# Altium PCB SSFocuser-C-TMC2208.PcbDoc
Units mm, origin at the board's own origin, x right, y up, seen from the top; angles counter-clockwise.
Board outline 77.93 x 40 mm, 2 copper layers (Top Layer, Bottom Layer); 49 components, 45 nets, 228 pads, 28 vias.
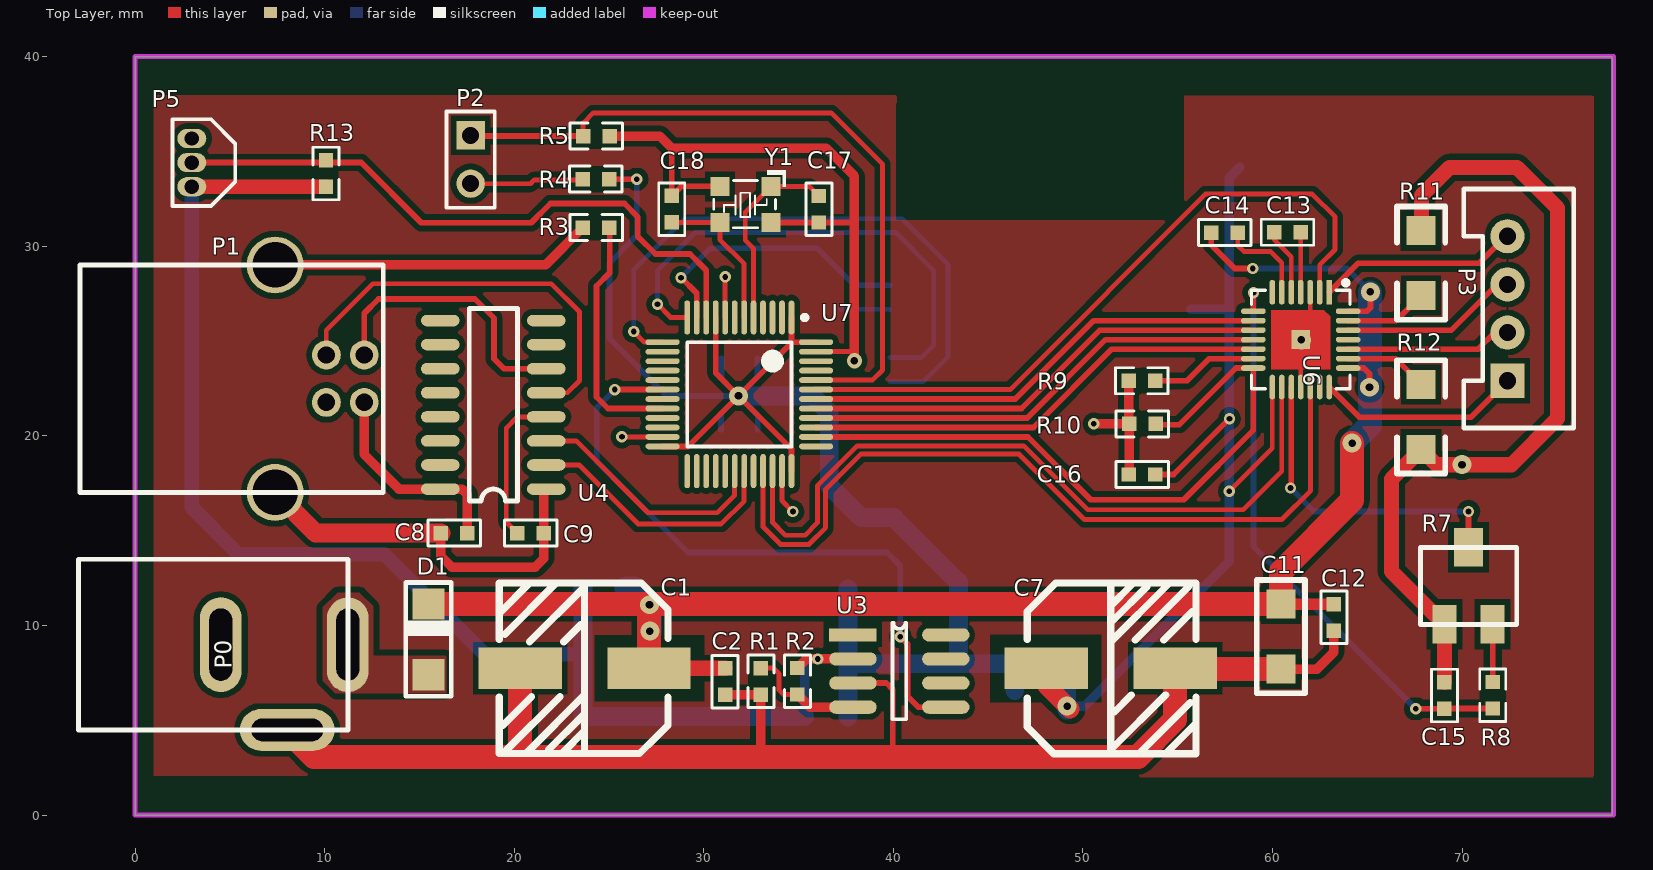
[diagram p0: Top Layer view]
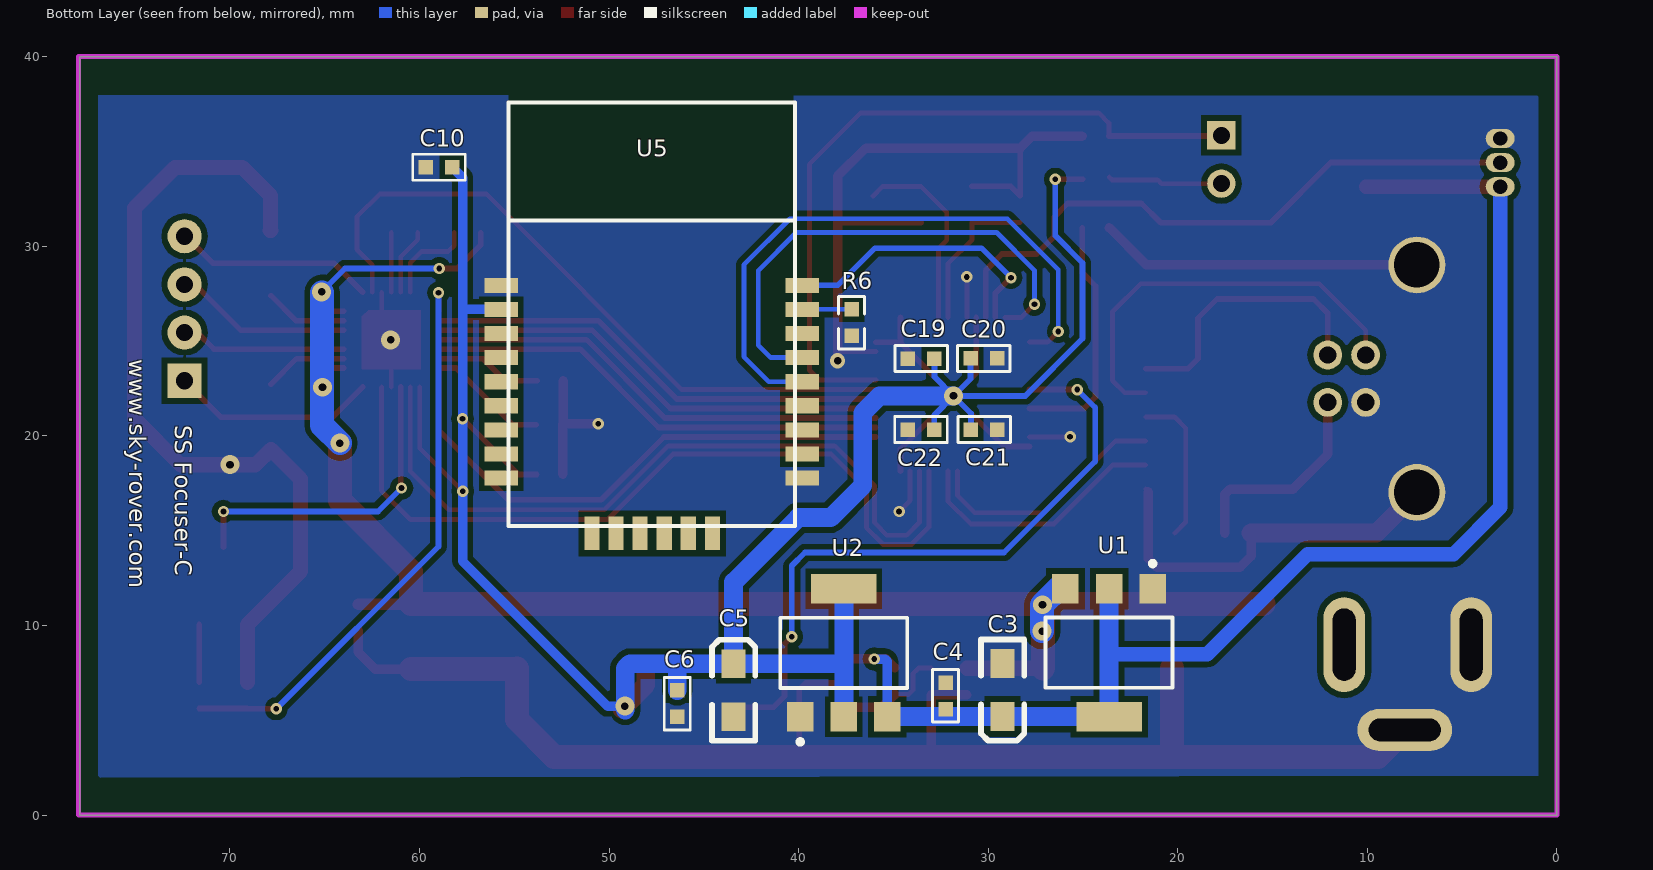
[diagram p1: Bottom Layer view, seen from below]

## Layer stack, top to bottom
Top Solder: solder mask 0.0102, Solder Resist, Dk 3.5
Top Layer: signal copper 0.0356
Dielectric1: dielectric 0.32, FR-4, Dk 4.8
Bottom Layer: signal copper 0.0356
Bottom Solder: solder mask 0.0102, Solder Resist, Dk 3.5

## Board outline
0,0 0,40.005 77.927,40.005 77.927,0

## Design rules (kind name [scope] priority, off if disabled: settings)
Clearance Clearance_pyog [InPolygon] p1: gap=0.305
Clearance Clearance_mcu [InComponentClass('U7')] p2: gap=0.178
Clearance [All] p3: gap=0.178
HoleSize [All] p1: absolutevalues=TRUE maxlimit=25.4 minlimit=0.025 maxpercent=80.000 minpercent=20.000
MinimumSolderMaskSliver [All] p1: minsoldermaskwidth=0
PolygonConnect [All] p1: connectstyle=Direct reliefconductorwidth=0.254 reliefentries=4 polygonreliefangle="90 Angle" airgapwidth=0.254
RoutingVias [All] p1: holewidth=0.711 width=1.27 viastyle="Through Hole" minholewidth=0.3 minwidth=0.45 maxholewidth=0.711 maxwidth=1.27
SilkToSilkClearance [All] p1: silktosilkclearance=0
SilkToSolderMaskClearance [IsPad] p1: minsilkscreentomaskgap=0 clearancetoexposedcopper=TRUE
SolderMaskExpansion [All] p1: expansion=0.102
Width [All] p1: maxlimit=1.27 minlimit=0.254 preferedwidth=0.254
25 further rules are at their usual default settings.

## Classes and differential pairs
component class SSFocuser-C: C1 C2 C3 C4 C5 C6 C7 C8 C9 C10 C11 C12 C13 C14 C15 C16 C22 D1 P0 P1 P2 P3 P5 R1 R2 R3 R4 R5 R6 R7 R8 R9 R10 R11 R12 R13 U1 U2 U3 U4 U5 U6 U7 Y1

## Components (designator, comment, footprint, x,y, rotation, side; value= is the part's Value field where it differs from the comment)
C1 "470uF" 16V/470U(CD10X10D5) 23.712,7.743 r180 top
C2 "100nF" 0603C 31.121,6.343 r90 top
C3 "10uF" 3216 29.24,5.192 r270 bottom
C4 "100nF" 0603C 32.248,6.985 r270 bottom
C5 "10uF" 3216 43.428,7.981 r90 bottom
C6 "100nF" 0603C 46.403,5.183 r90 bottom
C7 "1000uF" 16V/470U(CD10X10D5) 51.464,7.74 r0 top
C8 "100nF" 0603C 16.132,14.876 r0 top
C9 "100nF" 0603C 21.563,14.876 r180 top
C10 "100nF" 0603C 59.667,34.169 r180 bottom
C11 "1uF" 1206C 60.443,11.13 r270 top
C12 "100nF" 0603C 63.241,9.732 r90 top
C13 "22nF" 0603C 60.09,30.744 r0 top
C14 "100nF" 0603C 58.17,30.724 r180 top
C15 "2.2~4.7uF" 0603C 69.067,7.004 r270 top
C16 "100nF" 0603C 52.424,17.964 r0 top
C17 "20pF" 0603C 36.07,32.654 r270 top
C18 "20pF" 0603C 28.31,31.264 r90 top
C19 "100nF" 0603C 29.536,24.09 r0 bottom
C20 "100nF" 0603C 34.236,24.08 r180 bottom
C21 "100nF" 0603C 34.246,20.33 r180 bottom
C22 "100nF" 0603C 29.516,20.33 r0 bottom
D1 "M7" DO-214AC 15.477,9.27 r90 top
P0 "SOURCE" DC_5.5MM -2.973,13.492 r0 top locked
P1 "USB-B" USB-B 12.091,21.768 r0 top locked
P2 "BOOT0" HDR1X2 17.703,35.848 r270 top
P3 "Header 4" XH_4_V 72.39,22.911 r90 top locked
P5 "DS18B20" TO-92B 2.997,33.147 r90 top locked
R1 "2K" 0603R 33.015,7.752 r270 top
R2 "4.7K" 0603R 34.94,6.362 r90 top
R3 "10K" 0603R 23.621,30.984 r0 top
R4 "5K" 0603R 25.01,33.543 r180 top
R5 "10K" 0603R 23.637,35.817 r0 top
R6 "10K" 0603R 37.21,26.677 r270 bottom
R7 "RPot" VR_SMD 70.338,12.089 r0 top
R8 "20K" 0603R 71.615,5.622 r90 top
R9 "20K" 0603R 52.408,22.907 r0 top
R10 "20K" 0603R 52.438,20.637 r0 top
R11 "0.18Ω" 1206R 67.838,30.83 r270 top
R12 "0.18Ω" 1206R 67.838,19.292 r90 top
R13 "4.7K" 0603R 10.074,34.538 r270 top
U1 "AMS1117-5.0" SOT223 23.627,8.567 r0 bottom locked
U2 "AMS1117-3.3" SOT223 37.617,8.56 r180 bottom locked
U3 "MAX813LCSA" SOP-8 37.868,9.505 r0 top
U4 "CH340G" SO-16 21.692,17.196 r180 top locked
U5 "B-0006" B-0006 47.752,26.416 r180 bottom locked
U6 "TMC2208" "QFN28 5x5_M" 61.489,25.078 r180 top
U7 "STM32F103C8T6" LQFP48_N 31.878,22.196 r180 top
Y1 "8MHz" X3225 33.524,33.188 r180 top

## Footprints (in the part's own frame and the unit in brackets; to place one, negate y for a bottom-side part, rotate by r counter-clockwise, add the part's x,y. Pads: shape width x height; smd on the part's side, far side on the other; paste and mask are expansions set on the pad)
16V/470U(CD10X10D5) [mm] "取自《FE-3AD》"
  rect 4.4x2.2 smd: 1(-3.4,0) 2(3.4,0)
  Top Layer pour cut-out: -6.35,1.778 -0.508,1.778 -0.508,-1.778 -6.35,-1.778
  silkscreen extent -4.4,-4.5 4.5,4.5
0603C [mil]
  rect 30x30 smd: 1(0,0) 2(55,0)
  silkscreen extent -27,-27 82,27, body extent -4,-16 58,16, height 12
0603R [mil]
  rect 30x30 smd: 1(0,0) 2(55,0)
  silkscreen extent -27,-27 82,27, body extent -4,-18 58,16, height 18
1206C [mil]
  rect 60x60 smd: 1(0,0) 2(135,0)
  silkscreen extent -50,-50 185,50, body extent 6,-33 132,29, height 40
1206R [mil]
  rect 60x60 smd: 1(0,0) 2(135,0)
  silkscreen extent -50,-50 185,50, body extent 5,-32 131,30, height 22
3216 [mil]
  rect 60x50 smd: 1(0,0) 2(-110,0)
  silkscreen extent -160,-45 50,45, body extent -151,-35 38,36, height 73
B-0006 [mil]
  rect 70x31.5 smd: 1(-312.5,60) 2(-312.5,10) 3(-312.5,-40) 4(-312.5,-90) 5(-312.5,-140) 6(-312.5,-190) 7(-312.5,-240) 8(-312.5,-290) 9(-312.5,-340) 16(312.5,-340) 17(312.5,-290) 18(312.5,-240) 19(312.5,-190) 20(312.5,-140) 21(312.5,-90) 22(312.5,-40) 23(312.5,10) 24(312.5,60)
  rect 31.5x70 smd: 10(-124.04,-455) 11(-74.04,-455) 12(-24.04,-455) 13(25.96,-455) 14(75.96,-455) 15(125.96,-455)
  Top Layer pour cut-out: -298,439 -298,195 297,195 298,196 298,439
  silkscreen extent -298,-440 298,440
DC_5.5MM [mm]
  oval 2.2x5 hole 1.2 slot 3.8 at 90 deg: 1(14.2,-4.5) 2(7.5,-4.5)
  oval 5x2.2 hole 1.2 slot 3.8 at 0 deg: 3(11,-9)
  silkscreen extent 0,-9 14.2,0, body extent -0.1,-8.88 14.1,-0.12, height 10.82
DO-214AC [mm]
  rect 1.655x1.67 smd: 1(1.865,0) 2(-1.865,0)
  silkscreen extent -3,-1.2 3,1.2, body extent -2.74,-1.4 2.74,1.4, height 2.3
HDR1X2 [mm] "Connector; Header; 2 Position"
  rect 1.5x1.5 hole 0.9: 1(0,0)
  round 1.5 hole 0.9: 2(2.54,0)
  silkscreen extent -1.27,-1.27 3.81,1.27, body extent -1.27,-1.27 3.81,1.27, height 7.58
LQFP48_N [mm]
  oval 0.3x1.8 smd: 1(-2.75,-4.05) 2(-2.25,-4.05) 3(-1.75,-4.05) 4(-1.25,-4.05) 5(-0.75,-4.05) 6(-0.25,-4.05) 7(0.25,-4.05) 8(0.75,-4.05) 9(1.25,-4.05) 10(1.75,-4.05) 11(2.25,-4.05) 12(2.75,-4.05) 25(2.75,4.05) 26(2.25,4.05) 27(1.75,4.05) 28(1.25,4.05) 29(0.75,4.05) 30(0.25,4.05) 31(-0.25,4.05) 32(-0.75,4.05) 33(-1.25,4.05) 34(-1.75,4.05) 35(-2.25,4.05) 36(-2.75,4.05)
  oval 1.8x0.3 smd: 13(4.05,-2.75) 14(4.05,-2.25) 15(4.05,-1.75) 16(4.05,-1.25) 17(4.05,-0.75) 18(4.05,-0.25) 19(4.05,0.25) 20(4.05,0.75) 21(4.05,1.25) 22(4.05,1.75) 23(4.05,2.25) 24(4.05,2.75) 37(-4.05,2.75) 38(-4.05,2.25) 39(-4.05,1.75) 40(-4.05,1.25) 41(-4.05,0.75) 42(-4.05,0.25) 43(-4.05,-0.25) 44(-4.05,-0.75) 45(-4.05,-1.25) 46(-4.05,-1.75) 47(-4.05,-2.25) 48(-4.05,-2.75)
  silkscreen extent -3.58,-4.17 2.75,2.75, body extent -4.5,-4.5 4.5,4.5, height 1.5
"QFN28 5x5_M" [mm] "28脚，长x宽x高：5x5x0.8mm，脚距：0.5mm"
  rect 0.3x1.3 smd: 1(-1.5,-2.5)
  oval 0.3x1.3 smd: 2(-1,-2.5) 3(-0.5,-2.5) 4(0,-2.5) 5(0.5,-2.5) 6(1,-2.5) 7(1.5,-2.5) 15(1.5,2.5) 16(1,2.5) 17(0.5,2.5) 18(0,2.5) 19(-0.5,2.5) 20(-1,2.5) 21(-1.5,2.5)
  oval 1.3x0.3 smd: 8(2.5,-1.5) 9(2.5,-1) 10(2.5,-0.5) 11(2.5,0) 12(2.5,0.5) 13(2.5,1) 14(2.5,1.5) 22(-2.5,1.5) 23(-2.5,1) 24(-2.5,0.5) 25(-2.5,0) 26(-2.5,-0.5) 27(-2.5,-1) 28(-2.5,-1.5)
  rect 1x1 smd: 29(0,0)
  Top Layer region: -1.55,1.55 1.55,1.55 1.55,-1.55 -1.225,-1.55 -1.55,-1.225
  silkscreen extent -2.6,-3.12 2.6,2.6, body extent -2.51,-2.51 2.51,2.51, height 0.75
SO-16 [mil]
  oval 80x24 smd: 1(0,0) 2(0,-50) 3(0,-100) 4(0,-150) 5(0,-200) 6(0,-250) 7(0,-300) 8(0,-350) 9(220,-350) 10(220,-300) 11(220,-250) 12(220,-200) 13(220,-150) 14(220,-100) 15(220,-50) 16(220,0)
  silkscreen extent 60,-375 160,25, body extent -12,-377 226,29, height 77
SOP-8 [mm]
  rect 2.5x0.7 smd: 1(0,0)
  oval 2.5x0.7 smd: 2(0,-1.27) 3(0,-2.54) 4(0,-3.81) 5(4.9,-3.81) 6(4.9,-2.54) 7(4.9,-1.27) 8(4.9,0)
  silkscreen extent 2.08,-4.44 2.82,0.64, body extent -0.56,-4.44 5.48,0.58, height 1.6
SOT223 [mm] "SOT-223/SC-73; 4 Leads; Body 6.7 x 7.3 mm, inc. leads (LxW max)"
  rect 1.4x1.55 smd: 1(-2.3,-3.375) 2(0,-3.375) 3(2.3,-3.375)
  rect 3.45x1.55 smd: 4(0,3.375)
  silkscreen extent -3.35,-4.82 3.35,1.85, body extent -3.25,-3.53 3.25,3.43, height 1.7
TO-92B [mil]
  oval 40x60 hole 30: 1(0,0) 2(50,0) 3(100,0)
  silkscreen extent -40,-90 140,40
USB-B [mm]
  round 1.524 hole 0.92: 1(0,0) 2(0,2.5) 3(-2,2.5) 4(-2,0)
  round 3 hole 2.4: 5(-4.7,7.25) 6(-4.7,-4.75)
  silkscreen extent -15,-4.75 1,7.25
VR_SMD [mil]
  rect 50x80 smd: 1(-50,-80) 2(50,-80)
  rect 60x80 smd: 3(0,80)
  silkscreen extent -100,-80 100,80
X3225 [mm]
  rect 1x1 smd: 1(-0.025,0.025) 2(2.667,0.025) 3(2.667,1.93) 4(-0.025,1.93)
  silkscreen extent -0.81,-0.84 3,2.21, body extent -0.23,-0.29 2.97,2.21, height 0.72
XH_4_V [mm]
  rect 1.8x1.8 hole 0.9: 1(0,0)
  round 1.8 hole 0.9: 2(2.54,0) 3(5.08,0) 4(7.62,0)
  silkscreen extent -2.5,-3.5 10.12,2.3, body extent -2.39,-3.35 10.01,2.75, height 7

## Part data
C1: library part C470UF016S, "470UF      16V      CD10X10D5"
C2 C4 C6 C8 C10 C11 C12 C13 C14 C15 C16 C17 C18 C19 C20 C21 C22: library part Cap, "Capacitor"
C3 C5 C7: library part CAP2
C9: library part C
D1: library part Diode, "High Conductance Fast Diode"
P2: library part MHDR1X2, "Header, 2-Pin"
P3: "Header, 4-Pin"
P5: library part "Header 3", "Header, 3-Pin"
R1 R2 R5 R8 R9 R10 R11 R12 R13: library part RES, "Resistor"
R3 R4 R6: library part R
R7: "Potentiometer"
U1 U2: library part AMS1117
U3: library part MAX813L
U4: "USB2UART"
U7: "STM32 ARM-based 32-bit MCU Performance Line with 64 kB Flash, 20 kB Internal RAM, -40 to +85癈 Temperature, 48-Pin LQFP, Tray"
Y1: library part XTAL_1, "Crystal Oscillator"

## Via types
v1: diameter 0.6, hole 0.3, Top Layer to Bottom Layer, 18 vias
v2: diameter 1, hole 0.4, Top Layer to Bottom Layer, 9 vias
v3: diameter 0.8, hole 0.4, Top Layer to Bottom Layer, 1 vias

## Nets (pads, with @x,y where several pads share a name; then routed paths per layer and width w, separated by ;. In a path a pad name is that pad's centre, name@x,y a point inside that pad or via, vN(x,y) a via of type N, cw(c..) or ccw(c..) an arc to the next point about the centre after c; other vN are vias at no path point)
A1: P3.2 U6.24 | length 8.8
  Top Layer w0.3: U6.24 70.846,24.578 71.718,25.451 P3.2
A2: P3.1 U6.21 | length 10.9
  Top Layer w0.3: U6.21 64.582,20.985 70.464,20.985 P3.1
B1: P3.3 U6.26 | length 9.4
  Top Layer w0.3: U6.26 69.432,25.578 71.845,27.991 P3.3
B2: P3.4 U6.1 | length 10.6
  Top Layer w0.3: U6.1 64.516,29.105 70.898,29.105 72.324,30.531 P3.4
BOOT0: P2.1 R5.1 U7.44 | length 38.3
  Top Layer w0.254: R5.1 23.637,36.501 24.171,37.035 36.723,37.035 39.429,34.329 39.429,23.476 38.899,22.946 U7.44
  Top Layer w0.3: P2.1@17.703,35.817 R5.1
BOOT1: R3.2 U7.20 | length 13
  Top Layer w0.305: R3.2@25.041,30.984 25.041,28.61 24.336,27.904 24.336,22.053 24.944,21.446 U7.20
BRST: U5.24 U7.11 | length 14.9
  Top Layer w0.3: v1(28.801,28.35) 29.628,27.524 U7.11
  Bottom Layer w0.3: v1(28.801,28.35) 30.358,29.907 35.977,29.907 37.943,27.94 U5.24
BRX: U5.21 U7.12 | length 26.4
  Top Layer w0.254: v1(27.562,26.937) 28.253,26.246 U7.12
  Bottom Layer w0.254: v1(27.562,26.937) 27.562,28.73 29.56,30.729 40.121,30.729 42.132,28.718 42.132,24.791 41.471,24.13 U5.21
BTX: U5.20 U7.13 | length 32.2
  Top Layer w0.254: v1(26.306,25.507) 26.867,24.946 U7.13
  Bottom Layer w0.254: v1(26.306,25.507) 26.306,28.771 28.99,31.456 40.455,31.456 42.885,29.025 42.885,24.177 41.568,22.86 U5.20
D3V3: C5.1 C6.2 C7.1 C10.2 C16.2 C19.2 C20.2 C21.2 C22.2 R4.1 U2.2 U2.4 U5.2 U6.15 U7.1 U7.9 U7.24 U7.36 U7.48 | length 142.2
  Top Layer w0.254: v1(57.716,17.087) 59.989,19.36 U6.15
  Top Layer w0.3: R4.1 26.46,33.543 v1(26.464,33.539) ; U7.24 29.168,19.446 v2(31.832,22.11) ; U7.9 30.628,23.314 v2(31.832,22.11) ; U7.36 34.628,19.314 v2(31.832,22.11) ; U7.1 34.628,24.986 34.668,24.946 ; U7.48 34.668,24.946 ; C16.2 54.784,17.964 v1(57.73,20.911) ; v2(31.832,22.11) 34.668,24.946
  Top Layer w1: C7.1 48.064,6.85 v2@49.323,5.591
  Bottom Layer w0.3: v1(26.464,33.539) 26.464,30.564 25.023,29.122 25.023,25.136 28.049,22.11 v2(31.832,22.11) ; C22.2 30.913,21.191 v2(31.832,22.11) ; C19.2 30.933,23.009 v2(31.832,22.11) ; C20.2 32.839,23.116 v2(31.832,22.11) ; C21.2 32.849,21.094 v2(31.832,22.11)
  Bottom Layer w0.5: v2(49.171,5.743) 50.08,5.743 57.723,13.386 57.723,26.407 ; U5.2 57.699,26.67
  Bottom Layer w0.508: 57.723,26.407 57.723,33.623 C10.2
  Bottom Layer w1: v2(31.832,22.11) 35.728,22.11 36.619,21.219 36.619,17.382 38.312,15.689 40.027,15.689 43.428,12.287 C5.1 ; U2.2 U2.4 ; 37.672,7.981 C5.1 ; C6.2 46.403,7.838 46.259,7.981 ; v2@49.147,5.544 49.147,7.737 48.903,7.981 46.259,7.981 ; C5.1 46.259,7.981
D5V0: C3.1 C4.2 P5.1 R2.2 R13.2 U1.2 U1.4 U2.3 U3.2 | length 73.1
  Top Layer w0.5: R2.2 35.416,8.235 U3.2
  Top Layer w0.762: P5.1 10.068,33.147 R13.2
  Bottom Layer w0.5: U2.3 35.317,8.111 35.438,8.231 v1(36.007,8.231)
  Bottom Layer w0.762: P5.1 2.997,16.229 5.459,13.767 13.158,13.767 18.44,8.485 23.627,8.485
  Bottom Layer w1: U1.2 23.627,8.485 U1.4 U2.3@35.311,5.192
D12V0: C1.1 C2.2 C11.1 C12.2 C14.2 D1.1 U1.3 U6.22 U6.28 | length 90.6
  Top Layer w0.3: C14.2 56.773,30.059 58.005,28.827 v1(58.954,28.827) ; U6.22 64.811,23.578 65.114,23.275 v2(65.114,22.567) ; U6.28 64.987,26.578 65.165,26.756 v2(65.165,27.595)
  Top Layer w0.6: C11.1@60.445,11.129 C12.2
  Top Layer w0.8: C1.1@27.115,7.74 C2.2
  Top Layer w1.27: D1.1 C11.1@60.443,11.135 ; v2@27.096,11.135 27.112,11.119 C1.1 ; C11.1 C11.1@60.443,11.135 ; v2(64.196,19.619) 64.196,16.608 60.443,12.855 C11.1@60.443,11.135
  Bottom Layer w0.3: v1(58.954,28.827) 63.932,28.827 v2(65.165,27.595)
  Bottom Layer w1.27: U1.3 26.306,11.942 27.156,11.091 v2(27.156,9.701) ; v2(64.196,19.619) 65.137,20.561 v2@65.137,27.568
  other v2: 27.136,11.095
DIAG: U6.11 U7.40 | length 24.8
  Top Layer w0.3: U7.40 47.06,20.946 51.192,25.078 U6.11
DIR: U6.19 U7.33 | length 42.9
  Top Layer w0.254: U7.33 33.128,15.196 34.048,14.276 35.551,14.276 36.428,15.153 36.428,17.181 38.288,19.041 46.628,19.041 50.079,15.59 60.49,15.59 62.006,17.107 62.006,22.56 U6.19
EN: U6.2 U7.43 | length 36.4
  Top Layer w0.254: U7.43 46.156,22.446 56.464,32.753 62.095,32.753 63.298,31.55 63.298,29.832 62.489,29.022 U6.2
GND: C1.2 C2.1 C3.2 C4.1 C5.2 C6.1 C7.2 C8.1 C9.1 C10.1 C11.2 C12.1 C15.1 C16.1 C17.2 C18.2 C19.1 C20.1 C21.1 C22.1 P0.2 P0.3 P1.4 P1.5 P1.6 P5.3 R1.2 R3.1 R5.2 R6.2 R7.1 R9.1 R10.1 R11.1 R12.1 U1.1 U2.1 U3.3 U4.1 U5.1 U5.16 U6.3 U6.18 U6.29 U7.8 U7.23 U7.35 U7.47 Y1.2 Y1.4 | length 213.6
  Top Layer w0.254: U4.1@21.563,17.067 U4.1 ; v1(25.683,19.95) 25.687,19.946 U7.23 ; U7.8 v1(31.128,28.386) ; U7.35 34.128,16.586 v1(34.702,16.011) ; U7.47 37.921,24.446 37.945,24.422 v3(37.945,23.966) ; U6.18 U6.29 61.989,25.578 U6.3
  Top Layer w0.3: 28.31,35.186 C18.2 28.812,33.162 Y1.2 ; Y1.4 C17.2 37.955,31.257 ; U3.3 39.63,6.965 39.97,6.624 39.97,3.072
  Top Layer w0.5: P1.5 21.654,29.018 R3.1 ; C8.1 16.132,13.653 16.704,13.081 21.11,13.081 21.563,13.534 C9.1 U4.1@21.563,17.067 ; R5.2 27.68,35.817 28.31,35.186 ; 28.321,35.176 36.47,35.176 37.945,33.701 v3(37.945,23.966) ; C2.1 33.003,6.343 33.003,3.088 ; v1(50.578,20.637) R10.1 C16.1@52.438,17.978 ; R10.1@52.408,20.667 R9.1 ; C11.2 62.346,7.701 63.241,8.595 C12.1
  Top Layer w0.8: R11.1@67.832,30.836 67.879,30.836 67.853,30.863 67.853,32.682 69.334,34.164 72.888,34.164 75.031,32.021 75.031,20.912 72.601,18.482 v2(69.993,18.482) 68.648,18.482 R12.1 66.272,17.726 66.272,12.853 R7.1 C15.1@69.068,7.005
  Top Layer w1: P1.6 9.533,14.876 C8.1
  Top Layer w1.27: P0.2@4.527,7.992 P0.2 ; P0.3 9.446,3.072 20.371,3.072 ; C1.2 20.312,3.132 20.371,3.072 ; C11.2 54.903,7.701 C7.2 54.864,5.036 52.901,3.072 39.97,3.072 20.371,3.072
  other v2: 61.524,25.068
INDEX: U6.12 U7.39 | length 24.8
  Top Layer w0.3: U7.39 47.392,20.446 51.524,24.578 U6.12
MS1: U6.9 U7.42 | length 24.8
  Top Layer w0.3: U7.42 46.43,21.946 50.562,26.078 U6.9
MS2: U6.10 U7.41 | length 24.8
  Top Layer w0.3: U7.41 46.762,21.446 50.894,25.578 U6.10
NetC9_2: C9.2 U4.4 | length 8.1
  Top Layer w0.254: C9.2 19.583,15.459 19.583,20.415 20.174,21.006 U4.4
NetC13_1: C13.1 U6.5 | length 3.5
  Top Layer w0.254: C13.1 60.09,30.344 60.989,29.446 U6.5
NetC13_2: C13.2 U6.4 | length 3.2
  Top Layer w0.254: U6.4 C13.2@61.489,30.743
NetC14_1: C14.1 U6.6 | length 4.9
  Top Layer w0.254: C14.1 58.17,30.044 58.48,29.734 59.89,29.734 60.489,29.136 U6.6
NetC15_2: C15.2 R8.1 U6.8 | length 30.5
  Top Layer w0.3: U6.8 v1@58.989,27.545 ; v1@67.557,5.607 C15.2 ; C15.2@69.082,5.622 R8.1
  Bottom Layer w0.3: v1(58.994,27.545) 58.994,14.169 v1(67.554,5.609)
NetD1_1: D1.2 P0.1
NetP1_2: P1.2 U4.6 | length 14.9
  Top Layer w0.3: P1.2 12.091,26.474 12.843,27.225 17.925,27.225 18.937,26.213 18.937,24.067 19.459,23.546 U4.6
NetP1_3: P1.3 U4.5 | length 21.9
  Top Layer w0.254: P1.3 10.091,25.572 12.549,28.03 21.953,28.03 23.445,26.539 23.445,22.915 22.805,22.276 U4.5
NetP2_2: P2.2 R4.2 | length 6.1
  Top Layer w0.254: P2.2@17.703,33.3 20.862,33.3 21.065,33.503 23.472,33.503 R4.2@23.619,33.651
NetR1_1: R1.1 R2.1 U3.4 | length 6.2
  Top Layer w0.254: R1.1 33.678,7.752 33.975,7.455 33.975,6.582 34.195,6.362 R2.1
  Top Layer w0.508: R2.1 35.607,5.695 U3.4
NetR6_1: R6.1 U5.23 | length 2.6
  Bottom Layer w0.254: R6.1 39.807,26.677 U5.23
NetR7_2: R7.2 R8.2 | length 3
  Top Layer w0.3: R8.2 R7.2@71.615,10.05
NetR9_2: R9.2 U6.13 | length 5.7
  Top Layer w0.3: R9.2 55.494,22.907 56.665,24.078 U6.13
NetR11_2: R11.2 U6.27 | length 4.4
  Top Layer w0.3: U6.27 66.515,26.078 R11.2
NetR12_2: R12.2 U6.23 | length 4.4
  Top Layer w0.3: U6.23 66.481,24.078 R12.2
OSC_IN: C17.1 U7.5 Y1.1 | length 10.4
  Top Layer w0.254: U7.5 32.628,29.882 32.19,30.319 32.19,31.804 Y1.1 35.562,33.162 C17.1
OSC_OUT: C18.1 U7.6 Y1.3 | length 8.1
  Top Layer w0.254: C18.1 30.85,31.264 30.85,30.353 32.128,29.075 U7.6
PDN: R10.2 U6.14 U7.38 | length 35.6
  Top Layer w0.3: U7.38 47.098,19.946 50.409,16.635 55.317,16.635 58.989,20.307 U6.14 58.07,23.578 55.087,20.595 R10.2@53.835,20.595
PFO: U3.5 U7.18 | length 34.3
  Top Layer w0.3: v1@25.31,22.446 U7.18 ; v1(40.365,9.406) 40.743,9.028 40.743,6.266 41.315,5.695 U3.5
  Bottom Layer w0.3: v1(25.31,22.445) 24.361,21.495 24.361,18.649 29.164,13.845 39.667,13.845 40.365,13.148 v1(40.365,9.406)
RESET: U7.7
RXD: U4.3 U7.30 | length 13.2
  Top Layer w0.254: U4.3 23.274,19.736 27.059,15.95 30.715,15.95 31.628,16.863 U7.30
STEP: U6.16 U7.34 | length 39.6
  Top Layer w0.254: U7.34 33.628,15.434 34.297,14.765 35.341,14.765 35.996,15.419 35.996,17.372 38.097,19.473 46.881,19.473 50.253,16.1 58.447,16.1 60.489,18.142 U6.16
TEMP: P5.2 R13.1 U7.10 | length 33.4
  Top Layer w0.305: P5.2 11.929,34.417 15.103,31.243 20.906,31.243 21.916,32.253 25.822,32.253 26.523,31.552 26.523,30.519 27.453,29.589 29.271,29.589 30.128,28.732 U7.10
TXD: U4.2 U7.31 | length 13.8
  Top Layer w0.254: U4.2 23.422,18.466 26.532,15.355 30.919,15.355 32.128,16.564 U7.31
VBUS: C8.2 P1.1 U4.16 | length 11.1
  Top Layer w0.508: P1.1 12.091,19.024 13.92,17.196 U4.16 17.248,17.196 17.529,16.915 C8.2
VREF: R7.3 U6.17 | length 17.3
  Top Layer w0.3: v1(60.947,17.252) 60.989,17.21 U6.17 ; v1@70.287,16.063 v1(70.338,16.012) R7.3
  Bottom Layer w0.3: v1(60.947,17.252) 62.187,16.012 v1(70.338,16.012)
pads on no net: U3.1 U3.6 U3.7 U3.8 U4.7 U4.8 U4.9 U4.10 U4.11 U4.12 U4.13 U4.14 U4.15 U5.3 U5.4 U5.5 U5.6 U5.7 U5.8 U5.9 U5.10 U5.11 U5.12 U5.13 U5.14 U5.15 U5.17 U5.18 U5.19 U5.22 U6.7 U6.20 U6.25 U7.2 U7.3 U7.4 U7.14 U7.15 U7.16 U7.17 U7.19 U7.21 U7.22 U7.25 U7.26 U7.27 U7.28 U7.29 U7.32 U7.37 U7.45 U7.46

## Polygon pours and split planes (outlines as drawn)
no net on Top Layer "Bottom Layer-No Net" (solid, pour order 6): 76.945,1.976 76.945,37.934 76.877,38.003 76.808,37.934 55.343,37.934 55.343,31.439 55.317,31.413 55.313,31.418 40.167,31.418 40.167,37.899 40.166,37.9 40.098,37.968 0.995,37.968 0.995,2.113 0.961,2.078
NetD1_1 on Top Layer "Bottom Layer-No Net" (solid, remove dead copper, pour order 4): 16.416,6.431 10.568,6.431 9.908,7.091 9.908,10.746 9.908,10.958 10.662,11.713 10.686,11.736 11.865,11.736 11.865,11.713 12.502,11.076 12.572,11.005 12.572,8.411 16.369,8.411 16.416,8.364
GND on Bottom Layer "Bottom Layer-No Net" (solid, remove dead copper, pour order 6): 0.991,2.064 0.991,37.938 1.023,37.97 1.053,37.939 40.249,37.939 40.249,31.435 40.195,31.382 40.208,31.369 55.321,31.369 55.321,37.958 55.31,37.97 76.934,37.97 76.934,2.01 76.964,1.98

## Keep-outs
Keep-Out Layer:
  lines w0.254: 0,0 77.978,0 77.978,40.005 0,40.005 0,0

## Other copper
Multi-Layer:
  pour cut-out: 40.13,37.531 40.13,31.455 40.205,31.38 55.284,31.38 55.317,31.413 55.317,37.473 55.197,37.593 40.192,37.593

## Silkscreen, mask and mechanical layers (free items; w line width, h text height)
Bottom Overlay:
  text "www.sky-rover.com" at 75.316,24.052 h0.89 r90
  text "SS Focuser-C" at 72.904,20.564 h0.89 r90
Mechanical 2:
  drawing of 304 lines, arcs and shapes, not listed

## Dimensions
2.997,35.687 to 0,40.005 on Top Overlay
0,0 to -2.909,17.018 on Top Overlay
0,0 to -2.973,4.492 on Top Overlay
77.978,0 to 0,0 on Top Overlay
77.978,0 to 77.978,40.005 on Top Overlay